# Altium PCB transmitter.PcbDoc (part 2 of 2)
Units mil, origin at the board's own origin, x right, y up, seen from the top; angles counter-clockwise.
Board outline 2708.66 x 1574.8 mil, 2 copper layers (Top Layer, Bottom Layer), stack 65.792 mil thick; 44 components, 23 nets, 159 pads, 72 vias.
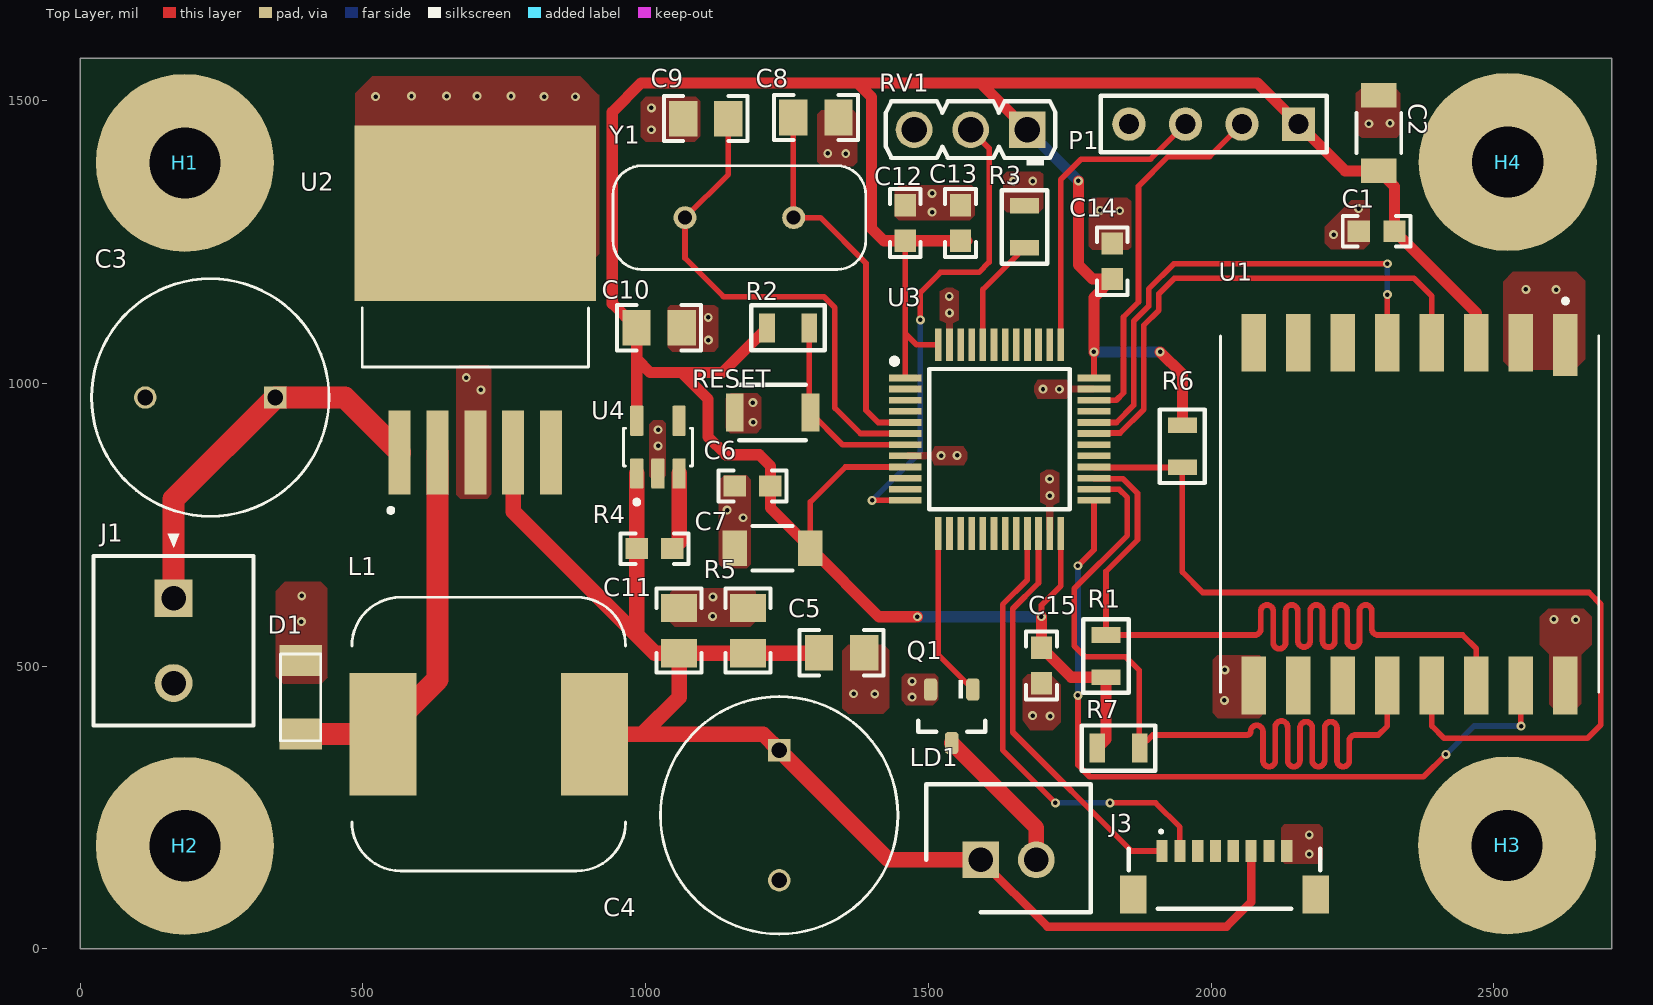
[diagram p0: Top Layer view]

## Polygon pours and split planes (outlines as drawn) (continued)
GND on Top Layer "Top Layer-GND 20" (solid, pour order 20): 1358.27,537.8 1348.03,527.56 1348.03,425.59 1357.87,415.75 1420.08,415.75 1430.71,426.38 1430.71,527.95 1420.87,537.8
no net on Top Layer "Top Layer-No Net 1" (solid, pour order 18): 1365.75,539.76
GND on Top Layer "Top Layer-GND 21" (solid, pour order 14): 1675.59,485.83 1666.93,477.17 1666.93,404.46 1680.31,386.61 1719.69,386.61 1734.25,401.18 1734.25,466.93 1715.35,485.83
GND on Top Layer "Top Layer-GND 22" (solid, pour order 12): 1458.86,486.61 1452.95,480.71 1452.95,439.37 1461.22,431.1 1508.07,431.1 1517.52,440.55 1517.52,480.71 1511.61,486.61
GND on Top Layer "Top Layer-GND" (solid, pour order 10): 516.14,1543.31 486.22,1513.39 486.22,1231.1 520.08,1197.24 885.43,1197.24 917.72,1229.53 917.72,1511.02 916.54,1511.02 884.25,1543.31
GND on Top Layer "Top Layer-GND 1" (solid, pour order 8): 670.87,1032.28 665.35,1026.77 665.35,803.54 672.44,796.46 719.69,796.46 727.17,803.94 727.17,1025.59 720.47,1032.28
GND on Top Layer "Top Layer-GND 2" (solid, pour order 4): 614.57,1004.72
GND on Bottom Layer (solid, pour order 97): 0,1574.8 0,0.39 2708.66,0.39 2708.66,1575.2

## Silkscreen, mask and mechanical layers (free items; w line width, h text height)
Board Layout:
  drawing of 323 lines, arcs and shapes, not listed
  text "Layer" at 2880.73,3567.53 h31.5
  text "Name" at 3105.41,3567.53 h31.5
  text "Material" at 3602.96,3567.53 h31.5
  text "Thickness" at 4063.79,3567.53 h31.5
  text "Constant" at 4414.41,3567.53 h31.5
  text "Board Layer Stack" at 4723.05,3567.53 h31.5
  text "1" at 2880.73,3504.54 h31.5
  text "Top Overlay" at 3105.41,3504.54 h31.5
  text "2" at 2880.73,3441.55 h31.5
  text "Top Solder" at 3105.41,3441.55 h31.5
  text "Solder Resist" at 3602.96,3441.55 h31.5
  text "0.40mil" at 4063.79,3441.55 h31.5
  text "3.5" at 4414.41,3441.55 h31.5
  text "3" at 2880.73,3378.56 h31.5
  text "Top Layer" at 3105.41,3378.56 h31.5
  text "Copper" at 3602.96,3378.56 h31.5
  text "1.40mil" at 4063.79,3378.56 h31.5
  text "4" at 2880.73,3315.56 h31.5
  text "Dielectric 1" at 3105.41,3315.56 h31.5
  text "FR-4" at 3602.96,3315.56 h31.5
  text "62.99mil" at 4063.79,3315.56 h31.5
  text "4.8" at 4414.41,3315.56 h31.5
  text "5" at 2880.73,3252.57 h31.5
  text "Bottom Layer" at 3105.41,3252.57 h31.5
  text "Copper" at 3602.96,3252.57 h31.5
  text "1.40mil" at 4063.79,3252.57 h31.5
  text "6" at 2880.73,3189.58 h31.5
  text "Bottom Solder" at 3105.41,3189.58 h31.5
  text "Solder Resist" at 3602.96,3189.58 h31.5
  text "0.40mil" at 4063.79,3189.58 h31.5
  text "3.5" at 4414.41,3189.58 h31.5
  text "7" at 2880.73,3126.59 h31.5
  text "Bottom Overlay" at 3105.41,3126.59 h31.5

## Dimensions
0,1575.2 to 2708.66,1575.2 on Board Layout
0,1575.2 to 0,0.39 on Board Layout